# Altium PCB Sitara_Project_Rev_A.PcbDoc (part 3 of 5)
Units mm, origin at the board's own origin, x right, y up, seen from the top; angles counter-clockwise.
Board outline 120 x 85 mm, 8 copper layers (L1 (Sig), L2 (GND), L3 (PWR), L4 (Sig), L5 (GND), L6 (Sig), L7 (GND), L8 (Sig)), stack 1.188 mm thick; 515 components, 404 nets, 2043 pads, 82 vias.
Unrouted connection lines stored in the file: 1274.
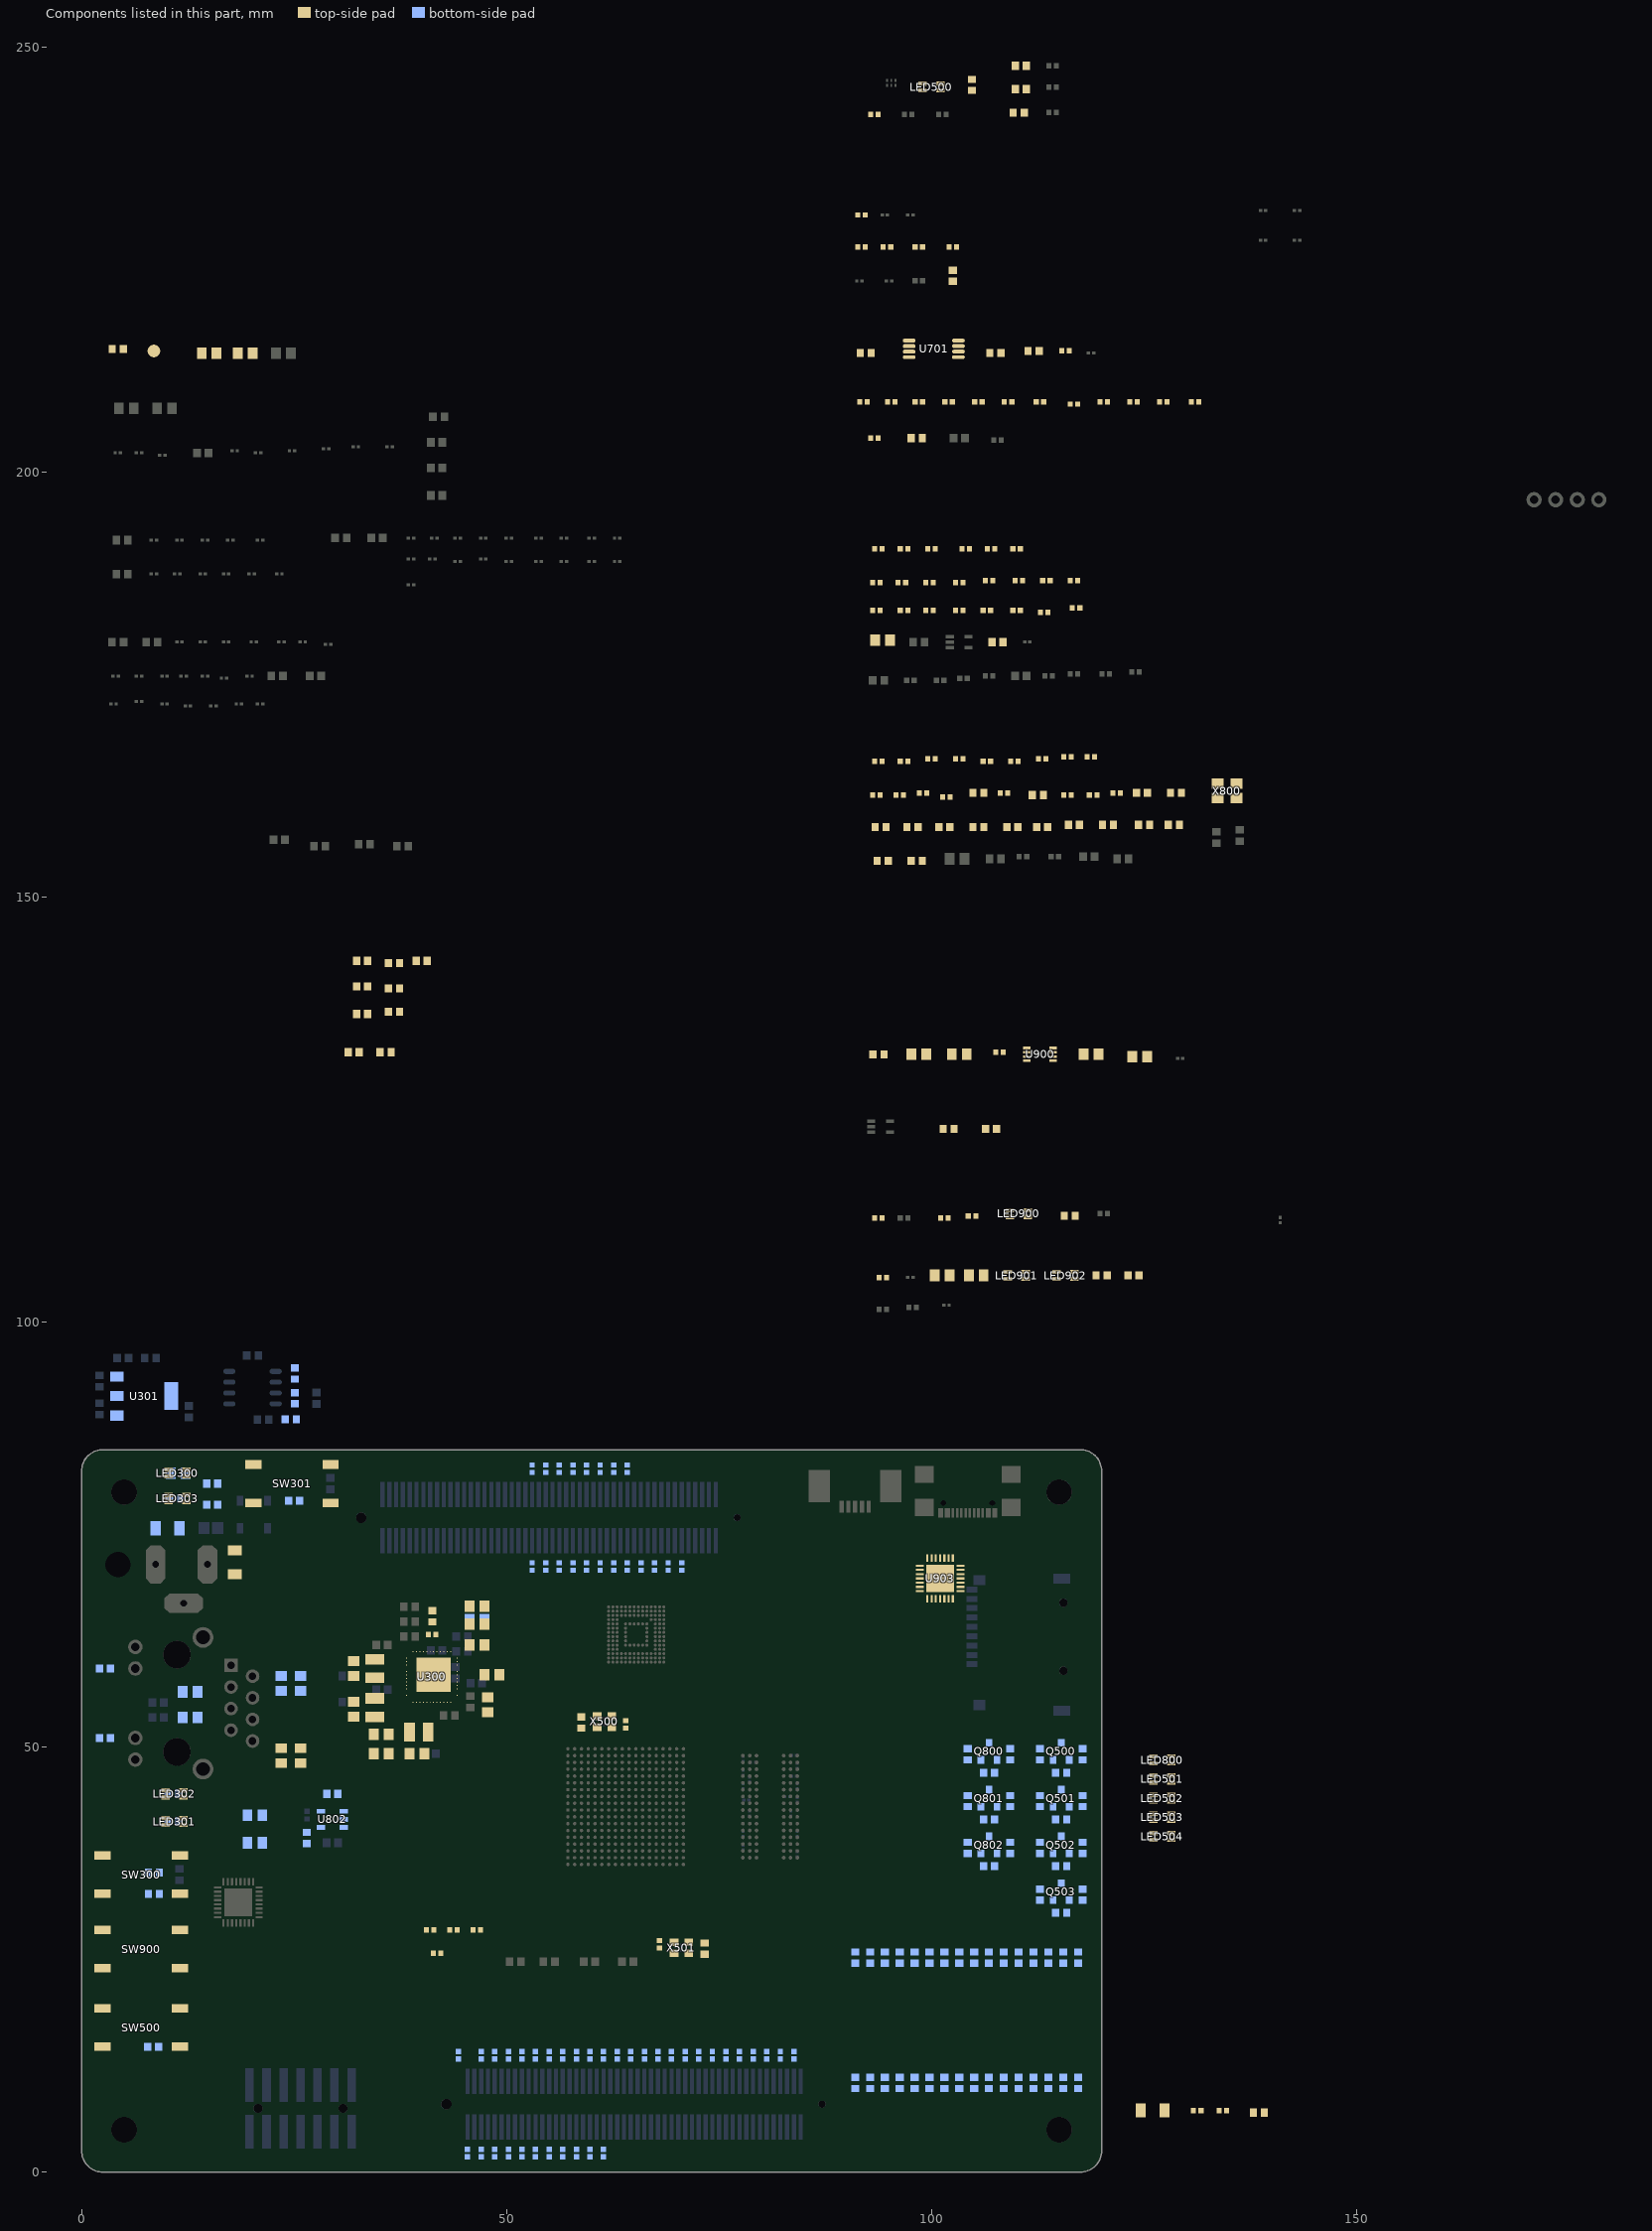
[diagram p4: the components of this part, seen from the top]

## Footprints (in the part's own frame and the unit in brackets; to place one, negate y for a bottom-side part, rotate by r counter-clockwise, add the part's x,y. Pads: shape width x height; smd on the part's side, far side on the other; paste and mask are expansions set on the pad) (continued)
IC_VQFN-48(6x6) [mm] "Footprint for TPS65217DRSLR (25.01.28)"
  rect 0.1x0.1 smd paste-1 mask+0: 1(-2.75,1.975) 2(-2.75,1.575) 3(-2.75,1.174) 4(-2.75,0.774) 5(-2.75,0.374) 6(-2.75,-0.026) 7(-2.75,-0.426) 8(-2.75,-0.826) 9(-2.75,-1.226) 10(-2.75,-1.626) 11(-2.75,-2.026) 12(-2.75,-2.426) 13(-1.975,-3.2) 14(-1.575,-3.2) 15(-1.175,-3.2) 16(-0.775,-3.2) 17(-0.375,-3.2) 18(0.025,-3.2) 19(0.425,-3.2) 20(0.825,-3.2) 21(1.225,-3.2) 22(1.625,-3.2) 23(2.025,-3.2) 24(2.425,-3.2) 25(3.2,-2.425) 26(3.2,-2.025) 27(3.2,-1.625) 28(3.2,-1.225) 29(3.2,-0.825) 30(3.2,-0.425) 31(3.2,-0.025) 32(3.2,0.375) 33(3.2,0.775) 34(3.2,1.175) 35(3.2,1.575) 36(3.2,1.975) 37(2.426,2.75) 38(2.026,2.75) 39(1.626,2.75) 40(1.226,2.75) 41(0.826,2.75) 42(0.426,2.75) 43(0.026,2.75) 44(-0.374,2.75) 45(-0.774,2.75) 46(-1.174,2.75) 47(-1.575,2.75) 48(-1.974,2.75)
  rect 4.05x4.05 smd paste-1.5 mask+0.038: 49(0,0)
  L1 (Sig) region: 3.625,-2.125 2.87,-2.125 2.865,-2.124 2.859,-2.124 2.854,-2.123 2.849,-2.122 2.844,-2.12 2.839,-2.118 2.834,-2.116 2.83,-2.114 2.825,-2.112 2.821,-2.109 2.816,-2.106 2.812,-2.103 2.808,-2.099 2.804,-2.096 2.801,-2.092 2.797,-2.088 2.794,-2.084 2.791,-2.079 2.788,-2.075 2.786,-2.07 2.784,-2.066 2.782,-2.061 2.78,-2.056 2.778,-2.051 2.777,-2.046 2.776,-2.041 2.776,-2.035 2.775,-2.03 2.775,-2.025 2.775,-2.02 2.776,-2.015 2.776,-2.009 2.777,-2.004 2.778,-1.999 2.78,-1.994 2.782,-1.989 2.784,-1.984 2.786,-1.98 2.788,-1.975 2.791,-1.971 2.794,-1.966 2.797,-1.962 2.801,-1.958 2.804,-1.954 2.808,-1.951 2.812,-1.947 2.816,-1.944 2.821,-1.941 2.825,-1.938 2.83,-1.936 2.834,-1.934 2.839,-1.932 2.844,-1.93 2.849,-1.928 2.854,-1.927 2.859,-1.926 2.865,-1.926 2.87,-1.925 3.625,-1.925
  L1 (Sig) region: 3.625,-1.725 2.87,-1.725 2.865,-1.724 2.859,-1.724 2.854,-1.723 2.849,-1.722 2.844,-1.72 2.839,-1.718 2.834,-1.716 2.83,-1.714 2.825,-1.712 2.821,-1.709 2.816,-1.706 2.812,-1.703 2.808,-1.699 2.804,-1.696 2.801,-1.692 2.797,-1.688 2.794,-1.684 2.791,-1.679 2.788,-1.675 2.786,-1.67 2.784,-1.666 2.782,-1.661 2.78,-1.656 2.778,-1.651 2.777,-1.646 2.776,-1.641 2.776,-1.635 2.775,-1.63 2.775,-1.625 2.775,-1.62 2.776,-1.615 2.776,-1.609 2.777,-1.604 2.778,-1.599 2.78,-1.594 2.782,-1.589 2.784,-1.584 2.786,-1.58 2.788,-1.575 2.791,-1.571 2.794,-1.566 2.797,-1.562 2.801,-1.558 2.804,-1.554 2.808,-1.551 2.812,-1.547 2.816,-1.544 2.821,-1.541 2.825,-1.538 2.83,-1.536 2.834,-1.534 2.839,-1.532 2.844,-1.53 2.849,-1.528 2.854,-1.527 2.859,-1.526 2.865,-1.526 2.87,-1.525 3.625,-1.525
  L1 (Sig) region: 3.625,-1.325 2.87,-1.325 2.865,-1.324 2.859,-1.324 2.854,-1.323 2.849,-1.322 2.844,-1.32 2.839,-1.318 2.834,-1.316 2.83,-1.314 2.825,-1.312 2.821,-1.309 2.816,-1.306 2.812,-1.303 2.808,-1.299 2.804,-1.296 2.801,-1.292 2.797,-1.288 2.794,-1.284 2.791,-1.279 2.788,-1.275 2.786,-1.27 2.784,-1.266 2.782,-1.261 2.78,-1.256 2.778,-1.251 2.777,-1.246 2.776,-1.241 2.776,-1.235 2.775,-1.23 2.775,-1.225 2.775,-1.22 2.776,-1.215 2.776,-1.209 2.777,-1.204 2.778,-1.199 2.78,-1.194 2.782,-1.189 2.784,-1.184 2.786,-1.18 2.788,-1.175 2.791,-1.171 2.794,-1.166 2.797,-1.162 2.801,-1.158 2.804,-1.154 2.808,-1.151 2.812,-1.147 2.816,-1.144 2.821,-1.141 2.825,-1.138 2.83,-1.136 2.834,-1.134 2.839,-1.132 2.844,-1.13 2.849,-1.128 2.854,-1.127 2.859,-1.126 2.865,-1.126 2.87,-1.125 3.625,-1.125
  L1 (Sig) region: 3.625,-0.925 2.87,-0.925 2.865,-0.924 2.859,-0.924 2.854,-0.923 2.849,-0.922 2.844,-0.92 2.839,-0.918 2.834,-0.916 2.83,-0.914 2.825,-0.912 2.821,-0.909 2.816,-0.906 2.812,-0.903 2.808,-0.899 2.804,-0.896 2.801,-0.892 2.797,-0.888 2.794,-0.884 2.791,-0.879 2.788,-0.875 2.786,-0.87 2.784,-0.866 2.782,-0.861 2.78,-0.856 2.778,-0.851 2.777,-0.846 2.776,-0.841 2.776,-0.835 2.775,-0.83 2.775,-0.825 2.775,-0.82 2.776,-0.815 2.776,-0.809 2.777,-0.804 2.778,-0.799 2.78,-0.794 2.782,-0.789 2.784,-0.784 2.786,-0.78 2.788,-0.775 2.791,-0.771 2.794,-0.766 2.797,-0.762 2.801,-0.758 2.804,-0.754 2.808,-0.751 2.812,-0.747 2.816,-0.744 2.821,-0.741 2.825,-0.738 2.83,-0.736 2.834,-0.734 2.839,-0.732 2.844,-0.73 2.849,-0.728 2.854,-0.727 2.859,-0.726 2.865,-0.726 2.87,-0.725 3.625,-0.725
  L1 (Sig) region: 3.625,0.275 2.87,0.275 2.865,0.276 2.859,0.276 2.854,0.277 2.849,0.278 2.844,0.28 2.839,0.282 2.834,0.284 2.83,0.286 2.825,0.288 2.821,0.291 2.816,0.294 2.812,0.297 2.808,0.301 2.804,0.304 2.801,0.308 2.797,0.312 2.794,0.316 2.791,0.321 2.788,0.325 2.786,0.33 2.784,0.334 2.782,0.339 2.78,0.344 2.778,0.349 2.777,0.354 2.776,0.359 2.776,0.365 2.775,0.37 2.775,0.375 2.775,0.38 2.776,0.385 2.776,0.391 2.777,0.396 2.778,0.401 2.78,0.406 2.782,0.411 2.784,0.416 2.786,0.42 2.788,0.425 2.791,0.429 2.794,0.434 2.797,0.438 2.801,0.442 2.804,0.446 2.808,0.449 2.812,0.453 2.816,0.456 2.821,0.459 2.825,0.462 2.83,0.464 2.834,0.466 2.839,0.468 2.844,0.47 2.849,0.472 2.854,0.473 2.859,0.474 2.865,0.474 2.87,0.475 3.625,0.475
  L1 (Sig) region: 3.625,0.675 2.87,0.675 2.865,0.676 2.859,0.676 2.854,0.677 2.849,0.678 2.844,0.68 2.839,0.682 2.834,0.684 2.83,0.686 2.825,0.688 2.821,0.691 2.816,0.694 2.812,0.697 2.808,0.701 2.804,0.704 2.801,0.708 2.797,0.712 2.794,0.716 2.791,0.721 2.788,0.725 2.786,0.73 2.784,0.734 2.782,0.739 2.78,0.744 2.778,0.749 2.777,0.754 2.776,0.759 2.776,0.765 2.775,0.77 2.775,0.775 2.775,0.78 2.776,0.785 2.776,0.791 2.777,0.796 2.778,0.801 2.78,0.806 2.782,0.811 2.784,0.816 2.786,0.82 2.788,0.825 2.791,0.829 2.794,0.834 2.797,0.838 2.801,0.842 2.804,0.846 2.808,0.849 2.812,0.853 2.816,0.856 2.821,0.859 2.825,0.862 2.83,0.864 2.834,0.866 2.839,0.868 2.844,0.87 2.849,0.872 2.854,0.873 2.859,0.874 2.865,0.874 2.87,0.875 3.625,0.875
  L1 (Sig) region: 3.625,1.075 2.87,1.075 2.865,1.076 2.859,1.076 2.854,1.077 2.849,1.078 2.844,1.08 2.839,1.082 2.834,1.084 2.83,1.086 2.825,1.088 2.821,1.091 2.816,1.094 2.812,1.097 2.808,1.101 2.804,1.104 2.801,1.108 2.797,1.112 2.794,1.116 2.791,1.121 2.788,1.125 2.786,1.13 2.784,1.134 2.782,1.139 2.78,1.144 2.778,1.149 2.777,1.154 2.776,1.159 2.776,1.165 2.775,1.17 2.775,1.175 2.775,1.18 2.776,1.185 2.776,1.191 2.777,1.196 2.778,1.201 2.78,1.206 2.782,1.211 2.784,1.216 2.786,1.22 2.788,1.225 2.791,1.229 2.794,1.234 2.797,1.238 2.801,1.242 2.804,1.246 2.808,1.249 2.812,1.253 2.816,1.256 2.821,1.259 2.825,1.262 2.83,1.264 2.834,1.266 2.839,1.268 2.844,1.27 2.849,1.272 2.854,1.273 2.859,1.274 2.865,1.274 2.87,1.275 3.625,1.275
  L1 (Sig) region: 3.625,1.475 2.87,1.475 2.865,1.476 2.859,1.476 2.854,1.477 2.849,1.478 2.844,1.48 2.839,1.482 2.834,1.484 2.83,1.486 2.825,1.488 2.821,1.491 2.816,1.494 2.812,1.497 2.808,1.501 2.804,1.504 2.801,1.508 2.797,1.512 2.794,1.516 2.791,1.521 2.788,1.525 2.786,1.53 2.784,1.534 2.782,1.539 2.78,1.544 2.778,1.549 2.777,1.554 2.776,1.559 2.776,1.565 2.775,1.57 2.775,1.575 2.775,1.58 2.776,1.585 2.776,1.591 2.777,1.596 2.778,1.601 2.78,1.606 2.782,1.611 2.784,1.616 2.786,1.62 2.788,1.625 2.791,1.629 2.794,1.634 2.797,1.638 2.801,1.642 2.804,1.646 2.808,1.649 2.812,1.653 2.816,1.656 2.821,1.659 2.825,1.662 2.83,1.664 2.834,1.666 2.839,1.668 2.844,1.67 2.849,1.672 2.854,1.673 2.859,1.674 2.865,1.674 2.87,1.675 3.625,1.675
  L1 (Sig) region: 3.625,1.875 2.87,1.875 2.865,1.876 2.859,1.876 2.854,1.877 2.849,1.878 2.844,1.88 2.839,1.882 2.834,1.884 2.83,1.886 2.825,1.888 2.821,1.891 2.816,1.894 2.812,1.897 2.808,1.901 2.804,1.904 2.801,1.908 2.797,1.912 2.794,1.916 2.791,1.921 2.788,1.925 2.786,1.93 2.784,1.934 2.782,1.939 2.78,1.944 2.778,1.949 2.777,1.954 2.776,1.959 2.776,1.965 2.775,1.97 2.775,1.975 2.775,1.98 2.776,1.985 2.776,1.991 2.777,1.996 2.778,2.001 2.78,2.006 2.782,2.011 2.784,2.016 2.786,2.02 2.788,2.025 2.791,2.029 2.794,2.034 2.797,2.038 2.801,2.042 2.804,2.046 2.808,2.049 2.812,2.053 2.816,2.056 2.821,2.059 2.825,2.062 2.83,2.064 2.834,2.066 2.839,2.068 2.844,2.07 2.849,2.072 2.854,2.073 2.859,2.074 2.865,2.074 2.87,2.075 3.625,2.075
  L1 (Sig) region: -2.415,-1.926 -2.409,-1.926 -2.404,-1.927 -2.399,-1.928 -2.394,-1.93 -2.389,-1.932 -2.384,-1.934 -2.38,-1.936 -2.375,-1.938 -2.371,-1.941 -2.366,-1.944 -2.362,-1.947 -2.358,-1.951 -2.354,-1.954 -2.351,-1.958 -2.347,-1.962 -2.344,-1.966 -2.341,-1.971 -2.338,-1.975 -2.336,-1.98 -2.334,-1.984 -2.332,-1.989 -2.33,-1.994 -2.328,-1.999 -2.327,-2.004 -2.326,-2.009 -2.326,-2.015 -2.325,-2.02 -2.325,-2.025 -2.325,-2.03 -2.326,-2.035 -2.326,-2.041 -2.327,-2.046 -2.328,-2.051 -2.33,-2.056 -2.332,-2.061 -2.334,-2.066 -2.336,-2.07 -2.338,-2.075 -2.341,-2.079 -2.344,-2.084 -2.347,-2.088 -2.351,-2.092 -2.354,-2.096 -2.358,-2.099 -2.362,-2.103 -2.366,-2.106 -2.371,-2.109 -2.375,-2.112 -2.38,-2.114 -2.384,-2.116 -2.389,-2.118 -2.394,-2.12 -2.399,-2.122 -2.404,-2.123 -2.409,-2.124 -2.415,-2.124 -2.42,-2.125 -3.175,-2.125 -3.175,-1.925 -2.42,-1.925
  L1 (Sig) region: -2.415,-1.526 -2.409,-1.526 -2.404,-1.527 -2.399,-1.528 -2.394,-1.53 -2.389,-1.532 -2.384,-1.534 -2.38,-1.536 -2.375,-1.538 -2.371,-1.541 -2.366,-1.544 -2.362,-1.547 -2.358,-1.551 -2.354,-1.554 -2.351,-1.558 -2.347,-1.562 -2.344,-1.566 -2.341,-1.571 -2.338,-1.575 -2.336,-1.58 -2.334,-1.584 -2.332,-1.589 -2.33,-1.594 -2.328,-1.599 -2.327,-1.604 -2.326,-1.609 -2.326,-1.615 -2.325,-1.62 -2.325,-1.625 -2.325,-1.63 -2.326,-1.635 -2.326,-1.641 -2.327,-1.646 -2.328,-1.651 -2.33,-1.656 -2.332,-1.661 -2.334,-1.666 -2.336,-1.67 -2.338,-1.675 -2.341,-1.679 -2.344,-1.684 -2.347,-1.688 -2.351,-1.692 -2.354,-1.696 -2.358,-1.699 -2.362,-1.703 -2.366,-1.706 -2.371,-1.709 -2.375,-1.712 -2.38,-1.714 -2.384,-1.716 -2.389,-1.718 -2.394,-1.72 -2.399,-1.722 -2.404,-1.723 -2.409,-1.724 -2.415,-1.724 -2.42,-1.725 -3.175,-1.725 -3.175,-1.525 -2.42,-1.525
  L1 (Sig) region: -2.415,-0.326 -2.409,-0.326 -2.404,-0.327 -2.399,-0.328 -2.394,-0.33 -2.389,-0.332 -2.384,-0.334 -2.38,-0.336 -2.375,-0.338 -2.371,-0.341 -2.366,-0.344 -2.362,-0.347 -2.358,-0.351 -2.354,-0.354 -2.351,-0.358 -2.347,-0.362 -2.344,-0.366 -2.341,-0.371 -2.338,-0.375 -2.336,-0.38 -2.334,-0.384 -2.332,-0.389 -2.33,-0.394 -2.328,-0.399 -2.327,-0.404 -2.326,-0.409 -2.326,-0.415 -2.325,-0.42 -2.325,-0.425 -2.325,-0.43 -2.326,-0.435 -2.326,-0.441 -2.327,-0.446 -2.328,-0.451 -2.33,-0.456 -2.332,-0.461 -2.334,-0.466 -2.336,-0.47 -2.338,-0.475 -2.341,-0.479 -2.344,-0.484 -2.347,-0.488 -2.351,-0.492 -2.354,-0.496 -2.358,-0.499 -2.362,-0.503 -2.366,-0.506 -2.371,-0.509 -2.375,-0.512 -2.38,-0.514 -2.384,-0.516 -2.389,-0.518 -2.394,-0.52 -2.399,-0.522 -2.404,-0.523 -2.409,-0.524 -2.415,-0.524 -2.42,-0.525 -3.175,-0.525 -3.175,-0.325 -2.42,-0.325
  L1 (Sig) region: -2.415,0.074 -2.409,0.074 -2.404,0.073 -2.399,0.072 -2.394,0.07 -2.389,0.068 -2.384,0.066 -2.38,0.064 -2.375,0.062 -2.371,0.059 -2.366,0.056 -2.362,0.053 -2.358,0.049 -2.354,0.046 -2.351,0.042 -2.347,0.038 -2.344,0.034 -2.341,0.029 -2.338,0.025 -2.336,0.02 -2.334,0.016 -2.332,0.011 -2.33,0.006 -2.328,0.001 -2.327,-0.004 -2.326,-0.009 -2.326,-0.015 -2.325,-0.02 -2.325,-0.025 -2.325,-0.03 -2.326,-0.035 -2.326,-0.041 -2.327,-0.046 -2.328,-0.051 -2.33,-0.056 -2.332,-0.061 -2.334,-0.066 -2.336,-0.07 -2.338,-0.075 -2.341,-0.079 -2.344,-0.084 -2.347,-0.088 -2.351,-0.092 -2.354,-0.096 -2.358,-0.099 -2.362,-0.103 -2.366,-0.106 -2.371,-0.109 -2.375,-0.112 -2.38,-0.114 -2.384,-0.116 -2.389,-0.118 -2.394,-0.12 -2.399,-0.122 -2.404,-0.123 -2.409,-0.124 -2.415,-0.124 -2.42,-0.125 -3.175,-0.125 -3.175,0.075 -2.42,0.075
  L1 (Sig) region: -2.415,0.474 -2.409,0.474 -2.404,0.473 -2.399,0.472 -2.394,0.47 -2.389,0.468 -2.384,0.466 -2.38,0.464 -2.375,0.462 -2.371,0.459 -2.366,0.456 -2.362,0.453 -2.358,0.449 -2.354,0.446 -2.351,0.442 -2.347,0.438 -2.344,0.434 -2.341,0.429 -2.338,0.425 -2.336,0.42 -2.334,0.416 -2.332,0.411 -2.33,0.406 -2.328,0.401 -2.327,0.396 -2.326,0.391 -2.326,0.385 -2.325,0.38 -2.325,0.375 -2.325,0.37 -2.326,0.365 -2.326,0.359 -2.327,0.354 -2.328,0.349 -2.33,0.344 -2.332,0.339 -2.334,0.334 -2.336,0.33 -2.338,0.325 -2.341,0.321 -2.344,0.316 -2.347,0.312 -2.351,0.308 -2.354,0.304 -2.358,0.301 -2.362,0.297 -2.366,0.294 -2.371,0.291 -2.375,0.288 -2.38,0.286 -2.384,0.284 -2.389,0.282 -2.394,0.28 -2.399,0.278 -2.404,0.277 -2.409,0.276 -2.415,0.276 -2.42,0.275 -3.175,0.275 -3.175,0.475 -2.42,0.475
  L1 (Sig) region: -2.415,1.274 -2.409,1.274 -2.404,1.273 -2.399,1.272 -2.394,1.27 -2.389,1.268 -2.384,1.266 -2.38,1.264 -2.375,1.262 -2.371,1.259 -2.366,1.256 -2.362,1.253 -2.358,1.249 -2.354,1.246 -2.351,1.242 -2.347,1.238 -2.344,1.234 -2.341,1.229 -2.338,1.225 -2.336,1.22 -2.334,1.216 -2.332,1.211 -2.33,1.206 -2.328,1.201 -2.327,1.196 -2.326,1.191 -2.326,1.185 -2.325,1.18 -2.325,1.175 -2.325,1.17 -2.326,1.165 -2.326,1.159 -2.327,1.154 -2.328,1.149 -2.33,1.144 -2.332,1.139 -2.334,1.134 -2.336,1.13 -2.338,1.125 -2.341,1.121 -2.344,1.116 -2.347,1.112 -2.351,1.108 -2.354,1.104 -2.358,1.101 -2.362,1.097 -2.366,1.094 -2.371,1.091 -2.375,1.088 -2.38,1.086 -2.384,1.084 -2.389,1.082 -2.394,1.08 -2.399,1.078 -2.404,1.077 -2.409,1.076 -2.415,1.076 -2.42,1.075 -3.175,1.075 -3.175,1.275 -2.42,1.275
  L1 (Sig) region: -2.415,1.674 -2.409,1.674 -2.404,1.673 -2.399,1.672 -2.394,1.67 -2.389,1.668 -2.384,1.666 -2.38,1.664 -2.375,1.662 -2.371,1.659 -2.366,1.656 -2.362,1.653 -2.358,1.649 -2.354,1.646 -2.351,1.642 -2.347,1.638 -2.344,1.634 -2.341,1.629 -2.338,1.625 -2.336,1.62 -2.334,1.616 -2.332,1.611 -2.33,1.606 -2.328,1.601 -2.327,1.596 -2.326,1.591 -2.326,1.585 -2.325,1.58 -2.325,1.575 -2.325,1.57 -2.326,1.565 -2.326,1.559 -2.327,1.554 -2.328,1.549 -2.33,1.544 -2.332,1.539 -2.334,1.534 -2.336,1.53 -2.338,1.525 -2.341,1.521 -2.344,1.516 -2.347,1.512 -2.351,1.508 -2.354,1.504 -2.358,1.501 -2.362,1.497 -2.366,1.494 -2.371,1.491 -2.375,1.488 -2.38,1.486 -2.384,1.484 -2.389,1.482 -2.394,1.48 -2.399,1.478 -2.404,1.477 -2.409,1.476 -2.415,1.476 -2.42,1.475 -3.175,1.475 -3.175,1.675 -2.42,1.675
  L1 (Sig) region: -2.415,2.074 -2.409,2.074 -2.404,2.073 -2.399,2.072 -2.394,2.07 -2.389,2.068 -2.384,2.066 -2.38,2.064 -2.375,2.062 -2.371,2.059 -2.366,2.056 -2.362,2.053 -2.358,2.049 -2.354,2.046 -2.351,2.042 -2.347,2.038 -2.344,2.034 -2.341,2.029 -2.338,2.025 -2.336,2.02 -2.334,2.016 -2.332,2.011 -2.33,2.006 -2.328,2.001 -2.327,1.996 -2.326,1.991 -2.326,1.985 -2.325,1.98 -2.325,1.975 -2.325,1.97 -2.326,1.965 -2.326,1.959 -2.327,1.954 -2.328,1.949 -2.33,1.944 -2.332,1.939 -2.334,1.934 -2.336,1.93 -2.338,1.925 -2.341,1.921 -2.344,1.916 -2.347,1.912 -2.351,1.908 -2.354,1.904 -2.358,1.901 -2.362,1.897 -2.366,1.894 -2.371,1.891 -2.375,1.888 -2.38,1.886 -2.384,1.884 -2.389,1.882 -2.394,1.88 -2.399,1.878 -2.404,1.877 -2.409,1.876 -2.415,1.876 -2.42,1.875 -3.175,1.875 -3.175,2.075 -2.42,2.075
  L1 (Sig) region: 2.435,-2.776 2.441,-2.776 2.446,-2.777 2.451,-2.778 2.456,-2.78 2.461,-2.782 2.466,-2.784 2.47,-2.786 2.475,-2.788 2.479,-2.791 2.484,-2.794 2.488,-2.797 2.492,-2.801 2.496,-2.804 2.499,-2.808 2.503,-2.812 2.506,-2.816 2.509,-2.821 2.512,-2.825 2.514,-2.83 2.516,-2.834 2.518,-2.839 2.52,-2.844 2.522,-2.849 2.523,-2.854 2.524,-2.859 2.524,-2.865 2.525,-2.87 2.525,-2.875 2.525,-3.625 2.325,-3.625 2.325,-2.875 2.325,-2.87 2.326,-2.865 2.326,-2.859 2.327,-2.854 2.328,-2.849 2.33,-2.844 2.332,-2.839 2.334,-2.834 2.336,-2.83 2.338,-2.825 2.341,-2.821 2.344,-2.816 2.347,-2.812 2.351,-2.808 2.354,-2.804 2.358,-2.801 2.362,-2.797 2.366,-2.794 2.371,-2.791 2.375,-2.788 2.38,-2.786 2.384,-2.784 2.389,-2.782 2.394,-2.78 2.399,-2.778 2.404,-2.777 2.409,-2.776 2.415,-2.776 2.42,-2.775 2.43,-2.775
  L1 (Sig) region: 2.035,-2.776 2.041,-2.776 2.046,-2.777 2.051,-2.778 2.056,-2.78 2.061,-2.782 2.066,-2.784 2.07,-2.786 2.075,-2.788 2.079,-2.791 2.084,-2.794 2.088,-2.797 2.092,-2.801 2.096,-2.804 2.099,-2.808 2.103,-2.812 2.106,-2.816 2.109,-2.821 2.112,-2.825 2.114,-2.83 2.116,-2.834 2.118,-2.839 2.12,-2.844 2.122,-2.849 2.123,-2.854 2.124,-2.859 2.124,-2.865 2.125,-2.87 2.125,-2.875 2.125,-3.625 1.925,-3.625 1.925,-2.875 1.925,-2.87 1.926,-2.865 1.926,-2.859 1.927,-2.854 1.928,-2.849 1.93,-2.844 1.932,-2.839 1.934,-2.834 1.936,-2.83 1.938,-2.825 1.941,-2.821 1.944,-2.816 1.947,-2.812 1.951,-2.808 1.954,-2.804 1.958,-2.801 1.962,-2.797 1.966,-2.794 1.971,-2.791 1.975,-2.788 1.98,-2.786 1.984,-2.784 1.989,-2.782 1.994,-2.78 1.999,-2.778 2.004,-2.777 2.009,-2.776 2.015,-2.776 2.02,-2.775 2.03,-2.775
  L1 (Sig) region: 1.635,-2.776 1.641,-2.776 1.646,-2.777 1.651,-2.778 1.656,-2.78 1.661,-2.782 1.666,-2.784 1.67,-2.786 1.675,-2.788 1.679,-2.791 1.684,-2.794 1.688,-2.797 1.692,-2.801 1.696,-2.804 1.699,-2.808 1.703,-2.812 1.706,-2.816 1.709,-2.821 1.712,-2.825 1.714,-2.83 1.716,-2.834 1.718,-2.839 1.72,-2.844 1.722,-2.849 1.723,-2.854 1.724,-2.859 1.724,-2.865 1.725,-2.87 1.725,-2.875 1.725,-3.625 1.525,-3.625 1.525,-2.875 1.525,-2.87 1.526,-2.865 1.526,-2.859 1.527,-2.854 1.528,-2.849 1.53,-2.844 1.532,-2.839 1.534,-2.834 1.536,-2.83 1.538,-2.825 1.541,-2.821 1.544,-2.816 1.547,-2.812 1.551,-2.808 1.554,-2.804 1.558,-2.801 1.562,-2.797 1.566,-2.794 1.571,-2.791 1.575,-2.788 1.58,-2.786 1.584,-2.784 1.589,-2.782 1.594,-2.78 1.599,-2.778 1.604,-2.777 1.609,-2.776 1.615,-2.776 1.62,-2.775 1.63,-2.775
  L1 (Sig) region: 1.235,-2.776 1.241,-2.776 1.246,-2.777 1.251,-2.778 1.256,-2.78 1.261,-2.782 1.266,-2.784 1.27,-2.786 1.275,-2.788 1.279,-2.791 1.284,-2.794 1.288,-2.797 1.292,-2.801 1.296,-2.804 1.299,-2.808 1.303,-2.812 1.306,-2.816 1.309,-2.821 1.312,-2.825 1.314,-2.83 1.316,-2.834 1.318,-2.839 1.32,-2.844 1.322,-2.849 1.323,-2.854 1.324,-2.859 1.324,-2.865 1.325,-2.87 1.325,-2.875 1.325,-3.625 1.125,-3.625 1.125,-2.875 1.125,-2.87 1.126,-2.865 1.126,-2.859 1.127,-2.854 1.128,-2.849 1.13,-2.844 1.132,-2.839 1.134,-2.834 1.136,-2.83 1.138,-2.825 1.141,-2.821 1.144,-2.816 1.147,-2.812 1.151,-2.808 1.154,-2.804 1.158,-2.801 1.162,-2.797 1.166,-2.794 1.171,-2.791 1.175,-2.788 1.18,-2.786 1.184,-2.784 1.189,-2.782 1.194,-2.78 1.199,-2.778 1.204,-2.777 1.209,-2.776 1.215,-2.776 1.22,-2.775 1.23,-2.775
  L1 (Sig) region: 0.835,-2.776 0.841,-2.776 0.846,-2.777 0.851,-2.778 0.856,-2.78 0.861,-2.782 0.866,-2.784 0.87,-2.786 0.875,-2.788 0.879,-2.791 0.884,-2.794 0.888,-2.797 0.892,-2.801 0.896,-2.804 0.899,-2.808 0.903,-2.812 0.906,-2.816 0.909,-2.821 0.912,-2.825 0.914,-2.83 0.916,-2.834 0.918,-2.839 0.92,-2.844 0.922,-2.849 0.923,-2.854 0.924,-2.859 0.924,-2.865 0.925,-2.87 0.925,-2.875 0.925,-3.625 0.725,-3.625 0.725,-2.875 0.725,-2.87 0.726,-2.865 0.726,-2.859 0.727,-2.854 0.728,-2.849 0.73,-2.844 0.732,-2.839 0.734,-2.834 0.736,-2.83 0.738,-2.825 0.741,-2.821 0.744,-2.816 0.747,-2.812 0.751,-2.808 0.754,-2.804 0.758,-2.801 0.762,-2.797 0.766,-2.794 0.771,-2.791 0.775,-2.788 0.78,-2.786 0.784,-2.784 0.789,-2.782 0.794,-2.78 0.799,-2.778 0.804,-2.777 0.809,-2.776 0.815,-2.776 0.82,-2.775 0.83,-2.775
  L1 (Sig) region: 0.435,-2.776 0.441,-2.776 0.446,-2.777 0.451,-2.778 0.456,-2.78 0.461,-2.782 0.466,-2.784 0.47,-2.786 0.475,-2.788 0.479,-2.791 0.484,-2.794 0.488,-2.797 0.492,-2.801 0.496,-2.804 0.499,-2.808 0.503,-2.812 0.506,-2.816 0.509,-2.821 0.512,-2.825 0.514,-2.83 0.516,-2.834 0.518,-2.839 0.52,-2.844 0.522,-2.849 0.523,-2.854 0.524,-2.859 0.524,-2.865 0.525,-2.87 0.525,-2.875 0.525,-3.625 0.325,-3.625 0.325,-2.875 0.325,-2.87 0.326,-2.865 0.326,-2.859 0.327,-2.854 0.328,-2.849 0.33,-2.844 0.332,-2.839 0.334,-2.834 0.336,-2.83 0.338,-2.825 0.341,-2.821 0.344,-2.816 0.347,-2.812 0.351,-2.808 0.354,-2.804 0.358,-2.801 0.362,-2.797 0.366,-2.794 0.371,-2.791 0.375,-2.788 0.38,-2.786 0.384,-2.784 0.389,-2.782 0.394,-2.78 0.399,-2.778 0.404,-2.777 0.409,-2.776 0.415,-2.776 0.42,-2.775 0.43,-2.775
  L1 (Sig) region: 0.035,-2.776 0.041,-2.776 0.046,-2.777 0.051,-2.778 0.056,-2.78 0.061,-2.782 0.066,-2.784 0.07,-2.786 0.075,-2.788 0.079,-2.791 0.084,-2.794 0.088,-2.797 0.092,-2.801 0.096,-2.804 0.099,-2.808 0.103,-2.812 0.106,-2.816 0.109,-2.821 0.112,-2.825 0.114,-2.83 0.116,-2.834 0.118,-2.839 0.12,-2.844 0.122,-2.849 0.123,-2.854 0.124,-2.859 0.124,-2.865 0.125,-2.87 0.125,-2.875 0.125,-3.625 -0.075,-3.625 -0.075,-2.875 -0.075,-2.87 -0.074,-2.865 -0.074,-2.859 -0.073,-2.854 -0.072,-2.849 -0.07,-2.844 -0.068,-2.839 -0.066,-2.834 -0.064,-2.83 -0.062,-2.825 -0.059,-2.821 -0.056,-2.816 -0.053,-2.812 -0.049,-2.808 -0.046,-2.804 -0.042,-2.801 -0.038,-2.797 -0.034,-2.794 -0.029,-2.791 -0.025,-2.788 -0.02,-2.786 -0.016,-2.784 -0.011,-2.782 -0.006,-2.78 -0.001,-2.778 0.004,-2.777 0.009,-2.776 0.015,-2.776 0.02,-2.775 0.03,-2.775
  L1 (Sig) region: -0.365,-2.776 -0.359,-2.776 -0.354,-2.777 -0.349,-2.778 -0.344,-2.78 -0.339,-2.782 -0.334,-2.784 -0.33,-2.786 -0.325,-2.788 -0.321,-2.791 -0.316,-2.794 -0.312,-2.797 -0.308,-2.801 -0.304,-2.804 -0.301,-2.808 -0.297,-2.812 -0.294,-2.816 -0.291,-2.821 -0.288,-2.825 -0.286,-2.83 -0.284,-2.834 -0.282,-2.839 -0.28,-2.844 -0.278,-2.849 -0.277,-2.854 -0.276,-2.859 -0.276,-2.865 -0.275,-2.87 -0.275,-2.875 -0.275,-3.625 -0.475,-3.625 -0.475,-2.875 -0.475,-2.87 -0.474,-2.865 -0.474,-2.859 -0.473,-2.854 -0.472,-2.849 -0.47,-2.844 -0.468,-2.839 -0.466,-2.834 -0.464,-2.83 -0.462,-2.825 -0.459,-2.821 -0.456,-2.816 -0.453,-2.812 -0.449,-2.808 -0.446,-2.804 -0.442,-2.801 -0.438,-2.797 -0.434,-2.794 -0.429,-2.791 -0.425,-2.788 -0.42,-2.786 -0.416,-2.784 -0.411,-2.782 -0.406,-2.78 -0.401,-2.778 -0.396,-2.777 -0.391,-2.776 -0.385,-2.776 -0.38,-2.775 -0.37,-2.775
  L1 (Sig) region: -0.765,-2.776 -0.759,-2.776 -0.754,-2.777 -0.749,-2.778 -0.744,-2.78 -0.739,-2.782 -0.734,-2.784 -0.73,-2.786 -0.725,-2.788 -0.721,-2.791 -0.716,-2.794 -0.712,-2.797 -0.708,-2.801 -0.704,-2.804 -0.701,-2.808 -0.697,-2.812 -0.694,-2.816 -0.691,-2.821 -0.688,-2.825 -0.686,-2.83 -0.684,-2.834 -0.682,-2.839 -0.68,-2.844 -0.678,-2.849 -0.677,-2.854 -0.676,-2.859 -0.676,-2.865 -0.675,-2.87 -0.675,-2.875 -0.675,-3.625 -0.875,-3.625 -0.875,-2.875 -0.875,-2.87 -0.874,-2.865 -0.874,-2.859 -0.873,-2.854 -0.872,-2.849 -0.87,-2.844 -0.868,-2.839 -0.866,-2.834 -0.864,-2.83 -0.862,-2.825 -0.859,-2.821 -0.856,-2.816 -0.853,-2.812 -0.849,-2.808 -0.846,-2.804 -0.842,-2.801 -0.838,-2.797 -0.834,-2.794 -0.829,-2.791 -0.825,-2.788 -0.82,-2.786 -0.816,-2.784 -0.811,-2.782 -0.806,-2.78 -0.801,-2.778 -0.796,-2.777 -0.791,-2.776 -0.785,-2.776 -0.78,-2.775 -0.77,-2.775
  L1 (Sig) region: -1.165,-2.776 -1.159,-2.776 -1.154,-2.777 -1.149,-2.778 -1.144,-2.78 -1.139,-2.782 -1.134,-2.784 -1.13,-2.786 -1.125,-2.788 -1.121,-2.791 -1.116,-2.794 -1.112,-2.797 -1.108,-2.801 -1.104,-2.804 -1.101,-2.808 -1.097,-2.812 -1.094,-2.816 -1.091,-2.821 -1.088,-2.825 -1.086,-2.83 -1.084,-2.834 -1.082,-2.839 -1.08,-2.844 -1.078,-2.849 -1.077,-2.854 -1.076,-2.859 -1.076,-2.865 -1.075,-2.87 -1.075,-2.875 -1.075,-3.625 -1.275,-3.625 -1.275,-2.875 -1.275,-2.87 -1.274,-2.865 -1.274,-2.859 -1.273,-2.854 -1.272,-2.849 -1.27,-2.844 -1.268,-2.839 -1.266,-2.834 -1.264,-2.83 -1.262,-2.825 -1.259,-2.821 -1.256,-2.816 -1.253,-2.812 -1.249,-2.808 -1.246,-2.804 -1.242,-2.801 -1.238,-2.797 -1.234,-2.794 -1.229,-2.791 -1.225,-2.788 -1.22,-2.786 -1.216,-2.784 -1.211,-2.782 -1.206,-2.78 -1.201,-2.778 -1.196,-2.777 -1.191,-2.776 -1.185,-2.776 -1.18,-2.775 -1.17,-2.775
  L1 (Sig) region: -1.565,-2.776 -1.559,-2.776 -1.554,-2.777 -1.549,-2.778 -1.544,-2.78 -1.539,-2.782 -1.534,-2.784 -1.53,-2.786 -1.525,-2.788 -1.521,-2.791 -1.516,-2.794 -1.512,-2.797 -1.508,-2.801 -1.504,-2.804 -1.501,-2.808 -1.497,-2.812 -1.494,-2.816 -1.491,-2.821 -1.488,-2.825 -1.486,-2.83 -1.484,-2.834 -1.482,-2.839 -1.48,-2.844 -1.478,-2.849 -1.477,-2.854 -1.476,-2.859 -1.476,-2.865 -1.475,-2.87 -1.475,-2.875 -1.475,-3.625 -1.675,-3.625 -1.675,-2.875 -1.675,-2.87 -1.674,-2.865 -1.674,-2.859 -1.673,-2.854 -1.672,-2.849 -1.67,-2.844 -1.668,-2.839 -1.666,-2.834 -1.664,-2.83 -1.662,-2.825 -1.659,-2.821 -1.656,-2.816 -1.653,-2.812 -1.649,-2.808 -1.646,-2.804 -1.642,-2.801 -1.638,-2.797 -1.634,-2.794 -1.629,-2.791 -1.625,-2.788 -1.62,-2.786 -1.616,-2.784 -1.611,-2.782 -1.606,-2.78 -1.601,-2.778 -1.596,-2.777 -1.591,-2.776 -1.585,-2.776 -1.58,-2.775 -1.57,-2.775
  L1 (Sig) region: -1.965,-2.776 -1.959,-2.776 -1.954,-2.777 -1.949,-2.778 -1.944,-2.78 -1.939,-2.782 -1.934,-2.784 -1.93,-2.786 -1.925,-2.788 -1.921,-2.791 -1.916,-2.794 -1.912,-2.797 -1.908,-2.801 -1.904,-2.804 -1.901,-2.808 -1.897,-2.812 -1.894,-2.816 -1.891,-2.821 -1.888,-2.825 -1.886,-2.83 -1.884,-2.834 -1.882,-2.839 -1.88,-2.844 -1.878,-2.849 -1.877,-2.854 -1.876,-2.859 -1.876,-2.865 -1.875,-2.87 -1.875,-2.875 -1.875,-3.625 -2.075,-3.625 -2.075,-2.875 -2.075,-2.87 -2.074,-2.865 -2.074,-2.859 -2.073,-2.854 -2.072,-2.849 -2.07,-2.844 -2.068,-2.839 -2.066,-2.834 -2.064,-2.83 -2.062,-2.825 -2.059,-2.821 -2.056,-2.816 -2.053,-2.812 -2.049,-2.808 -2.046,-2.804 -2.042,-2.801 -2.038,-2.797 -2.034,-2.794 -2.029,-2.791 -2.025,-2.788 -2.02,-2.786 -2.016,-2.784 -2.011,-2.782 -2.006,-2.78 -2.001,-2.778 -1.996,-2.777 -1.991,-2.776 -1.985,-2.776 -1.98,-2.775 -1.97,-2.775
  L1 (Sig) region: 2.525,2.425 2.525,2.42 2.524,2.415 2.524,2.409 2.523,2.404 2.522,2.399 2.52,2.394 2.518,2.389 2.516,2.384 2.514,2.38 2.512,2.375 2.509,2.371 2.506,2.366 2.503,2.362 2.499,2.358 2.496,2.354 2.492,2.351 2.488,2.347 2.484,2.344 2.479,2.341 2.475,2.338 2.47,2.336 2.466,2.334 2.461,2.332 2.456,2.33 2.451,2.328 2.446,2.327 2.441,2.326 2.435,2.326 2.43,2.325 2.42,2.325 2.415,2.326 2.409,2.326 2.404,2.327 2.399,2.328 2.394,2.33 2.389,2.332 2.384,2.334 2.38,2.336 2.375,2.338 2.371,2.341 2.366,2.344 2.362,2.347 2.358,2.351 2.354,2.354 2.351,2.358 2.347,2.362 2.344,2.366 2.341,2.371 2.338,2.375 2.336,2.38 2.334,2.384 2.332,2.389 2.33,2.394 2.328,2.399 2.327,2.404 2.326,2.409 2.326,2.415 2.325,2.42 2.325,2.425 2.325,3.175 2.525,3.175
  L1 (Sig) region: 2.125,2.425 2.125,2.42 2.124,2.415 2.124,2.409 2.123,2.404 2.122,2.399 2.12,2.394 2.118,2.389 2.116,2.384 2.114,2.38 2.112,2.375 2.109,2.371 2.106,2.366 2.103,2.362 2.099,2.358 2.096,2.354 2.092,2.351 2.088,2.347 2.084,2.344 2.079,2.341 2.075,2.338 2.07,2.336 2.066,2.334 2.061,2.332 2.056,2.33 2.051,2.328 2.046,2.327 2.041,2.326 2.035,2.326 2.03,2.325 2.02,2.325 2.015,2.326 2.009,2.326 2.004,2.327 1.999,2.328 1.994,2.33 1.989,2.332 1.984,2.334 1.98,2.336 1.975,2.338 1.971,2.341 1.966,2.344 1.962,2.347 1.958,2.351 1.954,2.354 1.951,2.358 1.947,2.362 1.944,2.366 1.941,2.371 1.938,2.375 1.936,2.38 1.934,2.384 1.932,2.389 1.93,2.394 1.928,2.399 1.927,2.404 1.926,2.409 1.926,2.415 1.925,2.42 1.925,2.425 1.925,3.175 2.125,3.175
  L1 (Sig) region: 1.725,2.425 1.725,2.42 1.724,2.415 1.724,2.409 1.723,2.404 1.722,2.399 1.72,2.394 1.718,2.389 1.716,2.384 1.714,2.38 1.712,2.375 1.709,2.371 1.706,2.366 1.703,2.362 1.699,2.358 1.696,2.354 1.692,2.351 1.688,2.347 1.684,2.344 1.679,2.341 1.675,2.338 1.67,2.336 1.666,2.334 1.661,2.332 1.656,2.33 1.651,2.328 1.646,2.327 1.641,2.326 1.635,2.326 1.63,2.325 1.62,2.325 1.615,2.326 1.609,2.326 1.604,2.327 1.599,2.328 1.594,2.33 1.589,2.332 1.584,2.334 1.58,2.336 1.575,2.338 1.571,2.341 1.566,2.344 1.562,2.347 1.558,2.351 1.554,2.354 1.551,2.358 1.547,2.362 1.544,2.366 1.541,2.371 1.538,2.375 1.536,2.38 1.534,2.384 1.532,2.389 1.53,2.394 1.528,2.399 1.527,2.404 1.526,2.409 1.526,2.415 1.525,2.42 1.525,2.425 1.525,3.175 1.725,3.175
  L1 (Sig) region: 0.925,2.425 0.925,2.42 0.924,2.415 0.924,2.409 0.923,2.404 0.922,2.399 0.92,2.394 0.918,2.389 0.916,2.384 0.914,2.38 0.912,2.375 0.909,2.371 0.906,2.366 0.903,2.362 0.899,2.358 0.896,2.354 0.892,2.351 0.888,2.347 0.884,2.344 0.879,2.341 0.875,2.338 0.87,2.336 0.866,2.334 0.861,2.332 0.856,2.33 0.851,2.328 0.846,2.327 0.841,2.326 0.835,2.326 0.83,2.325 0.82,2.325 0.815,2.326 0.809,2.326 0.804,2.327 0.799,2.328 0.794,2.33 0.789,2.332 0.784,2.334 0.78,2.336 0.775,2.338 0.771,2.341 0.766,2.344 0.762,2.347 0.758,2.351 0.754,2.354 0.751,2.358 0.747,2.362 0.744,2.366 0.741,2.371 0.738,2.375 0.736,2.38 0.734,2.384 0.732,2.389 0.73,2.394 0.728,2.399 0.727,2.404 0.726,2.409 0.726,2.415 0.725,2.42 0.725,2.425 0.725,3.175 0.925,3.175
  L1 (Sig) region: 0.525,2.425 0.525,2.42 0.524,2.415 0.524,2.409 0.523,2.404 0.522,2.399 0.52,2.394 0.518,2.389 0.516,2.384 0.514,2.38 0.512,2.375 0.509,2.371 0.506,2.366 0.503,2.362 0.499,2.358 0.496,2.354 0.492,2.351 0.488,2.347 0.484,2.344 0.479,2.341 0.475,2.338 0.47,2.336 0.466,2.334 0.461,2.332 0.456,2.33 0.451,2.328 0.446,2.327 0.441,2.326 0.435,2.326 0.43,2.325 0.42,2.325 0.415,2.326 0.409,2.326 0.404,2.327 0.399,2.328 0.394,2.33 0.389,2.332 0.384,2.334 0.38,2.336 0.375,2.338 0.371,2.341 0.366,2.344 0.362,2.347 0.358,2.351 0.354,2.354 0.351,2.358 0.347,2.362 0.344,2.366 0.341,2.371 0.338,2.375 0.336,2.38 0.334,2.384 0.332,2.389 0.33,2.394 0.328,2.399 0.327,2.404 0.326,2.409 0.326,2.415 0.325,2.42 0.325,2.425 0.325,3.175 0.525,3.175
  L1 (Sig) region: 0.125,2.425 0.125,2.42 0.124,2.415 0.124,2.409 0.123,2.404 0.122,2.399 0.12,2.394 0.118,2.389 0.116,2.384 0.114,2.38 0.112,2.375 0.109,2.371 0.106,2.366 0.103,2.362 0.099,2.358 0.096,2.354 0.092,2.351 0.088,2.347 0.084,2.344 0.079,2.341 0.075,2.338 0.07,2.336 0.066,2.334 0.061,2.332 0.056,2.33 0.051,2.328 0.046,2.327 0.041,2.326 0.035,2.326 0.03,2.325 0.02,2.325 0.015,2.326 0.009,2.326 0.004,2.327 -0.001,2.328 -0.006,2.33 -0.011,2.332 -0.016,2.334 -0.02,2.336 -0.025,2.338 -0.029,2.341 -0.034,2.344 -0.038,2.347 -0.042,2.351 -0.046,2.354 -0.049,2.358 -0.053,2.362 -0.056,2.366 -0.059,2.371 -0.062,2.375 -0.064,2.38 -0.066,2.384 -0.068,2.389 -0.07,2.394 -0.072,2.399 -0.073,2.404 -0.074,2.409 -0.074,2.415 -0.075,2.42 -0.075,2.425 -0.075,3.175 0.125,3.175
  L1 (Sig) region: -0.275,2.425 -0.275,2.42 -0.276,2.415 -0.276,2.409 -0.277,2.404 -0.278,2.399 -0.28,2.394 -0.282,2.389 -0.284,2.384 -0.286,2.38 -0.288,2.375 -0.291,2.371 -0.294,2.366 -0.297,2.362 -0.301,2.358 -0.304,2.354 -0.308,2.351 -0.312,2.347 -0.316,2.344 -0.321,2.341 -0.325,2.338 -0.33,2.336 -0.334,2.334 -0.339,2.332 -0.344,2.33 -0.349,2.328 -0.354,2.327 -0.359,2.326 -0.365,2.326 -0.37,2.325 -0.38,2.325 -0.385,2.326 -0.391,2.326 -0.396,2.327 -0.401,2.328 -0.406,2.33 -0.411,2.332 -0.416,2.334 -0.42,2.336 -0.425,2.338 -0.429,2.341 -0.434,2.344 -0.438,2.347 -0.442,2.351 -0.446,2.354 -0.449,2.358 -0.453,2.362 -0.456,2.366 -0.459,2.371 -0.462,2.375 -0.464,2.38 -0.466,2.384 -0.468,2.389 -0.47,2.394 -0.472,2.399 -0.473,2.404 -0.474,2.409 -0.474,2.415 -0.475,2.42 -0.475,2.425 -0.475,3.175 -0.275,3.175
  L1 (Sig) region: -0.675,2.425 -0.675,2.42 -0.676,2.415 -0.676,2.409 -0.677,2.404 -0.678,2.399 -0.68,2.394 -0.682,2.389 -0.684,2.384 -0.686,2.38 -0.688,2.375 -0.691,2.371 -0.694,2.366 -0.697,2.362 -0.701,2.358 -0.704,2.354 -0.708,2.351 -0.712,2.347 -0.716,2.344 -0.721,2.341 -0.725,2.338 -0.73,2.336 -0.734,2.334 -0.739,2.332 -0.744,2.33 -0.749,2.328 -0.754,2.327 -0.759,2.326 -0.765,2.326 -0.77,2.325 -0.78,2.325 -0.785,2.326 -0.791,2.326 -0.796,2.327 -0.801,2.328 -0.806,2.33 -0.811,2.332 -0.816,2.334 -0.82,2.336 -0.825,2.338 -0.829,2.341 -0.834,2.344 -0.838,2.347 -0.842,2.351 -0.846,2.354 -0.849,2.358 -0.853,2.362 -0.856,2.366 -0.859,2.371 -0.862,2.375 -0.864,2.38 -0.866,2.384 -0.868,2.389 -0.87,2.394 -0.872,2.399 -0.873,2.404 -0.874,2.409 -0.874,2.415 -0.875,2.42 -0.875,2.425 -0.875,3.175 -0.675,3.175
  L1 (Sig) region: -1.075,2.425 -1.075,2.42 -1.076,2.415 -1.076,2.409 -1.077,2.404 -1.078,2.399 -1.08,2.394 -1.082,2.389 -1.084,2.384 -1.086,2.38 -1.088,2.375 -1.091,2.371 -1.094,2.366 -1.097,2.362 -1.101,2.358 -1.104,2.354 -1.108,2.351 -1.112,2.347 -1.116,2.344 -1.121,2.341 -1.125,2.338 -1.13,2.336 -1.134,2.334 -1.139,2.332 -1.144,2.33 -1.149,2.328 -1.154,2.327 -1.159,2.326 -1.165,2.326 -1.17,2.325 -1.18,2.325 -1.185,2.326 -1.191,2.326 -1.196,2.327 -1.201,2.328 -1.206,2.33 -1.211,2.332 -1.216,2.334 -1.22,2.336 -1.225,2.338 -1.229,2.341 -1.234,2.344 -1.238,2.347 -1.242,2.351 -1.246,2.354 -1.249,2.358 -1.253,2.362 -1.256,2.366 -1.259,2.371 -1.262,2.375 -1.264,2.38 -1.266,2.384 -1.268,2.389 -1.27,2.394 -1.272,2.399 -1.273,2.404 -1.274,2.409 -1.274,2.415 -1.275,2.42 -1.275,2.425 -1.275,3.175 -1.075,3.175
  L1 (Sig) region: -1.475,2.425 -1.475,2.42 -1.476,2.415 -1.476,2.409 -1.477,2.404 -1.478,2.399 -1.48,2.394 -1.482,2.389 -1.484,2.384 -1.486,2.38 -1.488,2.375 -1.491,2.371 -1.494,2.366 -1.497,2.362 -1.501,2.358 -1.504,2.354 -1.508,2.351 -1.512,2.347 -1.516,2.344 -1.521,2.341 -1.525,2.338 -1.53,2.336 -1.534,2.334 -1.539,2.332 -1.544,2.33 -1.549,2.328 -1.554,2.327 -1.559,2.326 -1.565,2.326 -1.57,2.325 -1.58,2.325 -1.585,2.326 -1.591,2.326 -1.596,2.327 -1.601,2.328 -1.606,2.33 -1.611,2.332 -1.616,2.334 -1.62,2.336 -1.625,2.338 -1.629,2.341 -1.634,2.344 -1.638,2.347 -1.642,2.351 -1.646,2.354 -1.649,2.358 -1.653,2.362 -1.656,2.366 -1.659,2.371 -1.662,2.375 -1.664,2.38 -1.666,2.384 -1.668,2.389 -1.67,2.394 -1.672,2.399 -1.673,2.404 -1.674,2.409 -1.674,2.415 -1.675,2.42 -1.675,2.425 -1.675,3.175 -1.475,3.175
  L1 (Sig) region: -1.875,2.425 -1.875,2.42 -1.876,2.415 -1.876,2.409 -1.877,2.404 -1.878,2.399 -1.88,2.394 -1.882,2.389 -1.884,2.384 -1.886,2.38 -1.888,2.375 -1.891,2.371 -1.894,2.366 -1.897,2.362 -1.901,2.358 -1.904,2.354 -1.908,2.351 -1.912,2.347 -1.916,2.344 -1.921,2.341 -1.925,2.338 -1.93,2.336 -1.934,2.334 -1.939,2.332 -1.944,2.33 -1.949,2.328 -1.954,2.327 -1.959,2.326 -1.965,2.326 -1.97,2.325 -1.98,2.325 -1.985,2.326 -1.991,2.326 -1.996,2.327 -2.001,2.328 -2.006,2.33 -2.011,2.332 -2.016,2.334 -2.02,2.336 -2.025,2.338 -2.029,2.341 -2.034,2.344 -2.038,2.347 -2.042,2.351 -2.046,2.354 -2.049,2.358 -2.053,2.362 -2.056,2.366 -2.059,2.371 -2.062,2.375 -2.064,2.38 -2.066,2.384 -2.068,2.389 -2.07,2.394 -2.072,2.399 -2.073,2.404 -2.074,2.409 -2.074,2.415 -2.075,2.42 -2.075,2.425 -2.075,3.175 -1.875,3.175
  L1 (Sig) region: 1.325,2.425 1.325,2.42 1.324,2.415 1.324,2.409 1.323,2.404 1.322,2.399 1.32,2.394 1.318,2.389 1.316,2.384 1.314,2.38 1.312,2.375 1.309,2.371 1.306,2.366 1.303,2.362 1.299,2.358 1.296,2.354 1.292,2.351 1.288,2.347 1.284,2.344 1.279,2.341 1.275,2.338 1.27,2.336 1.266,2.334 1.261,2.332 1.256,2.33 1.251,2.328 1.246,2.327 1.241,2.326 1.235,2.326 1.23,2.325 1.22,2.325 1.215,2.326 1.209,2.326 1.204,2.327 1.199,2.328 1.194,2.33 1.189,2.332 1.184,2.334 1.18,2.336 1.175,2.338 1.171,2.341 1.166,2.344 1.162,2.347 1.158,2.351 1.154,2.354 1.151,2.358 1.147,2.362 1.144,2.366 1.141,2.371 1.138,2.375 1.136,2.38 1.134,2.384 1.132,2.389 1.13,2.394 1.128,2.399 1.127,2.404 1.126,2.409 1.126,2.415 1.125,2.42 1.125,2.425 1.125,3.175 1.325,3.175
  L1 (Sig) region: 3.625,-0.125 2.87,-0.125 2.865,-0.124 2.859,-0.124 2.854,-0.123 2.849,-0.122 2.844,-0.12 2.839,-0.118 2.834,-0.116 2.83,-0.114 2.825,-0.112 2.821,-0.109 2.816,-0.106 2.812,-0.103 2.808,-0.099 2.804,-0.096 2.801,-0.092 2.797,-0.088 2.794,-0.084 2.791,-0.079 2.788,-0.075 2.786,-0.07 2.784,-0.066 2.782,-0.061 2.78,-0.056 2.778,-0.051 2.777,-0.046 2.776,-0.041 2.776,-0.035 2.775,-0.03 2.775,-0.025 2.775,-0.02 2.776,-0.015 2.776,-0.009 2.777,-0.004 2.778,0.001 2.78,0.006 2.782,0.011 2.784,0.016 2.786,0.02 2.788,0.025 2.791,0.029 2.794,0.034 2.797,0.038 2.801,0.042 2.804,0.046 2.808,0.049 2.812,0.053 2.816,0.056 2.821,0.059 2.825,0.062 2.83,0.064 2.834,0.066 2.839,0.068 2.844,0.07 2.849,0.072 2.854,0.073 2.859,0.074 2.865,0.074 2.87,0.075 3.625,0.075
  L1 (Sig) region: 3.625,-0.525 2.87,-0.525 2.865,-0.524 2.859,-0.524 2.854,-0.523 2.849,-0.522 2.844,-0.52 2.839,-0.518 2.834,-0.516 2.83,-0.514 2.825,-0.512 2.821,-0.509 2.816,-0.506 2.812,-0.503 2.808,-0.499 2.804,-0.496 2.801,-0.492 2.797,-0.488 2.794,-0.484 2.791,-0.479 2.788,-0.475 2.786,-0.47 2.784,-0.466 2.782,-0.461 2.78,-0.456 2.778,-0.451 2.777,-0.446 2.776,-0.441 2.776,-0.435 2.775,-0.43 2.775,-0.425 2.775,-0.42 2.776,-0.415 2.776,-0.409 2.777,-0.404 2.778,-0.399 2.78,-0.394 2.782,-0.389 2.784,-0.384 2.786,-0.38 2.788,-0.375 2.791,-0.371 2.794,-0.366 2.797,-0.362 2.801,-0.358 2.804,-0.354 2.808,-0.351 2.812,-0.347 2.816,-0.344 2.821,-0.341 2.825,-0.338 2.83,-0.336 2.834,-0.334 2.839,-0.332 2.844,-0.33 2.849,-0.328 2.854,-0.327 2.859,-0.326 2.865,-0.326 2.87,-0.325 3.625,-0.325
  L1 (Sig) region: 3.625,-2.525 2.87,-2.525 2.865,-2.524 2.859,-2.524 2.854,-2.523 2.849,-2.522 2.844,-2.52 2.839,-2.518 2.834,-2.516 2.83,-2.514 2.825,-2.512 2.821,-2.509 2.816,-2.506 2.812,-2.503 2.808,-2.499 2.804,-2.496 2.801,-2.492 2.797,-2.488 2.794,-2.484 2.791,-2.479 2.788,-2.475 2.786,-2.47 2.784,-2.466 2.782,-2.461 2.78,-2.456 2.778,-2.451 2.777,-2.446 2.776,-2.441 2.776,-2.435 2.775,-2.43 2.775,-2.425 2.775,-2.42 2.776,-2.415 2.776,-2.409 2.777,-2.404 2.778,-2.399 2.78,-2.394 2.782,-2.389 2.784,-2.384 2.786,-2.38 2.788,-2.375 2.791,-2.371 2.794,-2.366 2.797,-2.362 2.801,-2.358 2.804,-2.354 2.808,-2.351 2.812,-2.347 2.816,-2.344 2.821,-2.341 2.825,-2.338 2.83,-2.336 2.834,-2.334 2.839,-2.332 2.844,-2.33 2.849,-2.328 2.854,-2.327 2.859,-2.326 2.865,-2.326 2.87,-2.325 3.625,-2.325
  L1 (Sig) region: -2.415,-2.326 -2.409,-2.326 -2.404,-2.327 -2.399,-2.328 -2.394,-2.33 -2.389,-2.332 -2.384,-2.334 -2.38,-2.336 -2.375,-2.338 -2.371,-2.341 -2.366,-2.344 -2.362,-2.347 -2.358,-2.351 -2.354,-2.354 -2.351,-2.358 -2.347,-2.362 -2.344,-2.366 -2.341,-2.371 -2.338,-2.375 -2.336,-2.38 -2.334,-2.384 -2.332,-2.389 -2.33,-2.394 -2.328,-2.399 -2.327,-2.404 -2.326,-2.409 -2.326,-2.415 -2.325,-2.42 -2.325,-2.425 -2.325,-2.43 -2.326,-2.435 -2.326,-2.441 -2.327,-2.446 -2.328,-2.451 -2.33,-2.456 -2.332,-2.461 -2.334,-2.466 -2.336,-2.47 -2.338,-2.475 -2.341,-2.479 -2.344,-2.484 -2.347,-2.488 -2.351,-2.492 -2.354,-2.496 -2.358,-2.499 -2.362,-2.503 -2.366,-2.506 -2.371,-2.509 -2.375,-2.512 -2.38,-2.514 -2.384,-2.516 -2.389,-2.518 -2.394,-2.52 -2.399,-2.522 -2.404,-2.523 -2.409,-2.524 -2.415,-2.524 -2.42,-2.525 -3.175,-2.525 -3.175,-2.325 -2.42,-2.325
  L1 (Sig) region: -2.415,-1.126 -2.409,-1.126 -2.404,-1.127 -2.399,-1.128 -2.394,-1.13 -2.389,-1.132 -2.384,-1.134 -2.38,-1.136 -2.375,-1.138 -2.371,-1.141 -2.366,-1.144 -2.362,-1.147 -2.358,-1.151 -2.354,-1.154 -2.351,-1.158 -2.347,-1.162 -2.344,-1.166 -2.341,-1.171 -2.338,-1.175 -2.336,-1.18 -2.334,-1.184 -2.332,-1.189 -2.33,-1.194 -2.328,-1.199 -2.327,-1.204 -2.326,-1.209 -2.326,-1.215 -2.325,-1.22 -2.325,-1.225 -2.325,-1.23 -2.326,-1.235 -2.326,-1.241 -2.327,-1.246 -2.328,-1.251 -2.33,-1.256 -2.332,-1.261 -2.334,-1.266 -2.336,-1.27 -2.338,-1.275 -2.341,-1.279 -2.344,-1.284 -2.347,-1.288 -2.351,-1.292 -2.354,-1.296 -2.358,-1.299 -2.362,-1.303 -2.366,-1.306 -2.371,-1.309 -2.375,-1.312 -2.38,-1.314 -2.384,-1.316 -2.389,-1.318 -2.394,-1.32 -2.399,-1.322 -2.404,-1.323 -2.409,-1.324 -2.415,-1.324 -2.42,-1.325 -3.175,-1.325 -3.175,-1.125 -2.42,-1.125
  L1 (Sig) region: -2.415,-0.726 -2.409,-0.726 -2.404,-0.727 -2.399,-0.728 -2.394,-0.73 -2.389,-0.732 -2.384,-0.734 -2.38,-0.736 -2.375,-0.738 -2.371,-0.741 -2.366,-0.744 -2.362,-0.747 -2.358,-0.751 -2.354,-0.754 -2.351,-0.758 -2.347,-0.762 -2.344,-0.766 -2.341,-0.771 -2.338,-0.775 -2.336,-0.78 -2.334,-0.784 -2.332,-0.789 -2.33,-0.794 -2.328,-0.799 -2.327,-0.804 -2.326,-0.809 -2.326,-0.815 -2.325,-0.82 -2.325,-0.825 -2.325,-0.83 -2.326,-0.835 -2.326,-0.841 -2.327,-0.846 -2.328,-0.851 -2.33,-0.856 -2.332,-0.861 -2.334,-0.866 -2.336,-0.87 -2.338,-0.875 -2.341,-0.879 -2.344,-0.884 -2.347,-0.888 -2.351,-0.892 -2.354,-0.896 -2.358,-0.899 -2.362,-0.903 -2.366,-0.906 -2.371,-0.909 -2.375,-0.912 -2.38,-0.914 -2.384,-0.916 -2.389,-0.918 -2.394,-0.92 -2.399,-0.922 -2.404,-0.923 -2.409,-0.924 -2.415,-0.924 -2.42,-0.925 -3.175,-0.925 -3.175,-0.725 -2.42,-0.725
  L1 (Sig) region: -2.415,0.874 -2.409,0.874 -2.404,0.873 -2.399,0.872 -2.394,0.87 -2.389,0.868 -2.384,0.866 -2.38,0.864 -2.375,0.862 -2.371,0.859 -2.366,0.856 -2.362,0.853 -2.358,0.849 -2.354,0.846 -2.351,0.842 -2.347,0.838 -2.344,0.834 -2.341,0.829 -2.338,0.825 -2.336,0.82 -2.334,0.816 -2.332,0.811 -2.33,0.806 -2.328,0.801 -2.327,0.796 -2.326,0.791 -2.326,0.785 -2.325,0.78 -2.325,0.775 -2.325,0.77 -2.326,0.765 -2.326,0.759 -2.327,0.754 -2.328,0.749 -2.33,0.744 -2.332,0.739 -2.334,0.734 -2.336,0.73 -2.338,0.725 -2.341,0.721 -2.344,0.716 -2.347,0.712 -2.351,0.708 -2.354,0.704 -2.358,0.701 -2.362,0.697 -2.366,0.694 -2.371,0.691 -2.375,0.688 -2.38,0.686 -2.384,0.684 -2.389,0.682 -2.394,0.68 -2.399,0.678 -2.404,0.677 -2.409,0.676 -2.415,0.676 -2.42,0.675 -3.175,0.675 -3.175,0.875 -2.42,0.875
  silkscreen extent -3.45,-3.22 3.22,2.85, body extent -2.77,-3.22 3.22,2.77, height 1
IC_VSSOP-8 [mm]
  rect 0.85x0.3 smd mask+0.038: 1(-1.55,0.75) 2(-1.55,0.25) 3(-1.55,-0.25) 4(-1.55,-0.75) 5(1.55,-0.75) 6(1.55,-0.25) 7(1.55,0.25) 8(1.55,0.75)
  silkscreen extent -1.65,-1.1 1.15,1.35, body extent -1.55,-1 1.55,1, height 0.9
IND_LQM2HPN2R2MG0L [mm] "2.2 μH Shielded Multilayer Inductor 1.3 A 100mOhm Max 1008 (2520 Metric)"
  rect 1.24x2.22 smd: 1(-1.09,0) 2(1.09,0)
  silkscreen extent -0.15,-1.1 0.15,1.1, body extent -1.25,-1 1.25,1, height 1
"LED MHT170RGBCT" [mm] "Colorless transparence -30占쏙옙~+85占쏙옙 Positive post Common anode RGB 120占쏙옙 0805  Light Emitting Diodes (LED) ROHS"
  rect 1x0.5 smd mask+0.04: 1(-1.05,0.4) 2(1.05,0.4) 3(1.05,-0.4) 4(-1.05,-0.4)
  silkscreen extent -2.25,-0.9 1.85,0.9, body extent -1,-0.62 1,0.62, height 0.9
"LED MHT170RGBCT (BLUE)" [mm] "Colorless transparence -30占쏙옙~+85占쏙옙 Positive post Common anode RGB 120占쏙옙 0805  Light Emitting Diodes (LED) ROHS"
  rect 1x0.5 smd mask+0.04: 1(-1.05,0.4) 2(1.05,0.4) 3(1.05,-0.4) 4(-1.05,-0.4)
  silkscreen extent -2.25,-0.9 1.85,0.9, body extent -1,-0.62 1,0.62, height 0.9
"LED MHT170RGBCT (GREEN)" [mm] "Colorless transparence -30占쏙옙~+85占쏙옙 Positive post Common anode RGB 120占쏙옙 0805  Light Emitting Diodes (LED) ROHS"
  rect 1x0.5 smd mask+0.04: 1(-1.05,0.4) 2(1.05,0.4) 3(1.05,-0.4) 4(-1.05,-0.4)
  silkscreen extent -2.25,-0.9 1.85,0.9, body extent -1,-0.62 1,0.62, height 0.9
"OSC SMD_2.5x2.0 (SCTF)" [mm] "SMD Oscillator_2.5x2.0 (SCTF)"
  rect 1x0.9 smd: 1(-0.85,-0.65) 2(0.85,-0.65) 3(0.85,0.65) 4(-0.85,0.65)
  silkscreen extent -1.65,-1.9 1.65,1.4, body extent -1.25,-1 1.25,1, height 0.9
OSC_SMD_3.2x2.5(YXC) [mm] "SMD Oscillator_3.2x2.5 (YXC)"
  rect 1.4x1.2 smd mask+0.038: 1(-1.1,-0.85) 2(1.1,-0.85) 3(1.1,0.85) 4(-1.1,0.85)
  silkscreen extent -2.1,-2.25 2.1,1.75, body extent -1.6,-1.25 1.6,1.25, height 1.05
"QFN-28 (5x5mm)" [mm] "QFN-28 (5x5mm)"
  rect 0.9x0.25 smd mask+0.04: 1(-2.4,1.5) 2(-2.4,1) 3(-2.4,0.5) 4(-2.4,0) 5(-2.4,-0.5) 6(-2.4,-1) 7(-2.4,-1.5) 15(2.4,-1.5) 16(2.4,-1) 17(2.4,-0.5) 18(2.4,0) 19(2.4,0.5) 20(2.4,1) 21(2.4,1.5)
  rect 0.25x0.9 smd mask+0.04: 8(-1.5,-2.4) 9(-1,-2.4) 10(-0.5,-2.4) 11(0,-2.4) 12(0.5,-2.4) 13(1,-2.4) 14(1.5,-2.4) 22(1.5,2.4) 23(1,2.4) 24(0.5,2.4) 25(0,2.4) 26(-0.5,2.4) 27(-1,2.4) 28(-1.5,2.4)
  rect 3.25x3.25 smd mask+0.04: 29(0,0)
  silkscreen extent -3.22,-2.5 2.5,2.5, body extent -2.5,-2.5 2.5,2.5, height 1
"RES 1005 (0402_inch)" [mm] "Chip Resistor, 2-Leads, Body 1.0x0.5mm, IPC Medium Density"
  rect 0.6x0.64 smd mask+0.038: 1(-0.44,0) 2(0.44,0)
  silkscreen extent -1,-0.51 1,0.51, body extent -0.5,-0.25 0.5,0.25, height 0.35
"RES 1608 (0603_inch)" [mm] "Chip Resistor, 2-Leads, Body 1.60x0.80mm, IPC Medium Density"
  rect 0.85x0.95 smd: 1(-0.65,0) 2(0.65,0)
  silkscreen extent -1.27,-0.7 1.27,0.7, body extent -0.8,-0.4 0.8,0.4, height 0.45
"RES 1608 (0603_inch)/NC" [mm] "Chip Resistor, 2-Leads, Body 1.60x0.80mm, IPC Medium Density"
  rect 0.85x0.95 smd: 1(-0.65,0) 2(0.65,0)
  silkscreen extent -1.27,-0.7 1.27,0.7
"RES 2012 (0805_inch)" [mm] "Chip Resistor, 2-Leads, Body 2.00x1.25mm, IPC Medium Density"
  rect 1.15x1.35 smd: 1(-0.875,0) 2(0.875,0)
  silkscreen extent -1.7,-0.9 1.7,0.9, body extent -1,-0.62 1,0.63, height 0.6
"RES 2012 (0805_INCH)/NC" [mm] "Chip Resistor, 2-Leads, Body 2.00x1.25mm, IPC Medium Density"
  rect 1.15x1.35 smd: 1(-0.875,0) 2(0.875,0)
  silkscreen extent -1.7,-0.9 1.7,0.9
"RES 3216 (1206_inch)" [mm] "Chip Resistor, 2-Leads, Body 3.13x1.55mm, IPC Medium Density"
  rect 1.2x1.65 smd: 1(-1.4,0) 2(1.4,0)
  silkscreen extent -2.3,-1.1 2.3,1.1, body extent -1.6,-0.8 1.6,0.8, height 0.6
"SOT 23-3 (DIODES INCORPORATED)" [mm] "SOT23, 3-Leads, Body 2.90x2.40mm, Pitch 0.95mm, IPC Medium Density"
  rect 0.9x0.8 smd: 1(-1,0.95) 2(-1,-0.95) 3(1,0)
  silkscreen extent -0.7,-1.45 0.7,1.45, body extent -1.41,-1.45 1.41,1.45, height 1.5
"SOT 223-3 (DIODES INCORPORATED)" [mm] "SOT223, 4-Leads, Body 6.50x7.00mm (avg), Pitch 2.30mm, IPC Medium Density"
  rect 1.6x1.2 smd: 1(-3.2,2.3) 2(-3.2,0) 3(-3.2,-2.3)
  rect 1.6x3.3 smd: 4(3.2,0)
  silkscreen extent -3.27,-3.35 1.85,3.72, body extent -3.52,-3.25 3.5,3.25, height 1.8
"SOT-23-5 (TI DBV PACKAGE)" [mm] "SOT23, 5-Leads, Body 2.90x2.80mm, Pitch 0.95mm, IPC Medium Density"
  rect 1x0.55 smd: 1(-1.35,0.95) 2(-1.35,0) 3(-1.35,-0.95) 4(1.35,-0.95) 5(1.35,0.95)
  silkscreen extent -1.48,-1.55 0.5,1.9, body extent -1.44,-1.42 1.39,1.48, height 1.5
"SW K2-1102SP-C4SC-04" [mm] "-25占쏙옙~+85占쏙옙 6mm 5mm Round Button 50mA Brick nogging 6mm SPST 100M占쏙옙 100000 250gf@占쏙옙30gf 12V SMD  Tactile Switches ROHS"
  rect 1.9x1 smd: 1(-4.55,2.25) 2(4.55,2.25) 3(-4.55,-2.25) 4(4.55,-2.25)
  silkscreen extent -3,-3 3,3, body extent -4.25,-3.05 4.25,3.05, height 4.3
"TP Circle" [mm] "Test Point Circle"
  round 1.5 smd: 1(0,0)
"TSSOP-8_PW (TI)" [mm] "TSSOP, 8-Leads, Body 3.00x4.40mm, Pitch 0.65mm, IPC Medium Density"
  oval 1.5x0.45 smd: 1(-2.9,0.975) 2(-2.9,0.325) 3(-2.9,-0.325) 4(-2.9,-0.975) 5(2.9,-0.975) 6(2.9,-0.325) 7(2.9,0.325) 8(2.9,0.975)
  silkscreen extent -3.07,-1.55 1.85,1.87, body extent -3.21,-1.5 3.21,1.5, height 1.2